# Altium PCB Node.PcbDoc
Units mm, origin at the board's own origin, x right, y up, seen from the top; angles counter-clockwise.
Board outline 80 x 75 mm, 2 copper layers (Top Layer, Bottom Layer); 51 components, 44 nets, 258 pads, 77 vias.
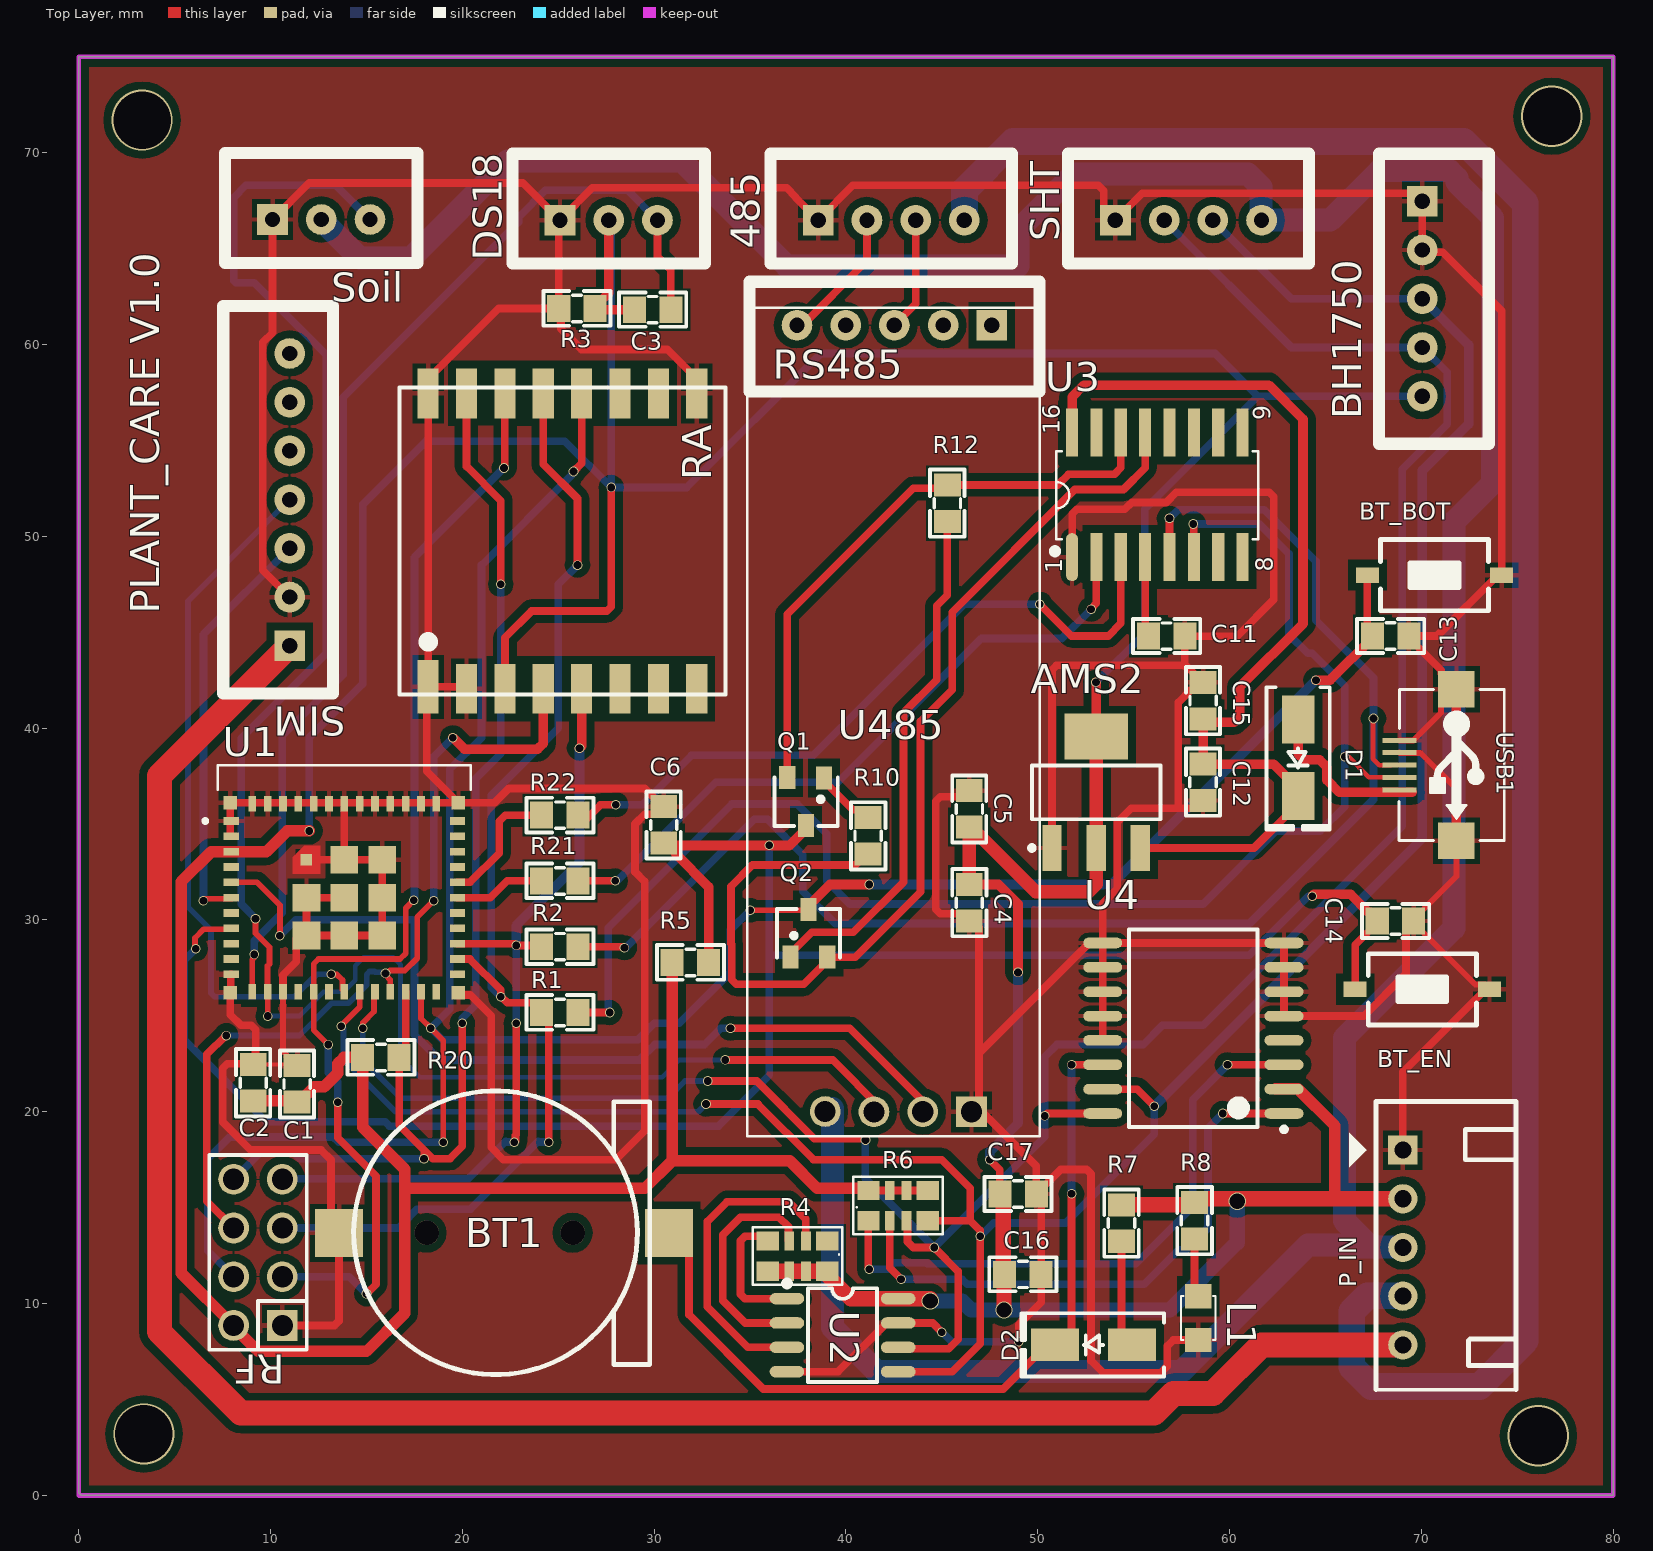
[diagram p0: Top Layer view]
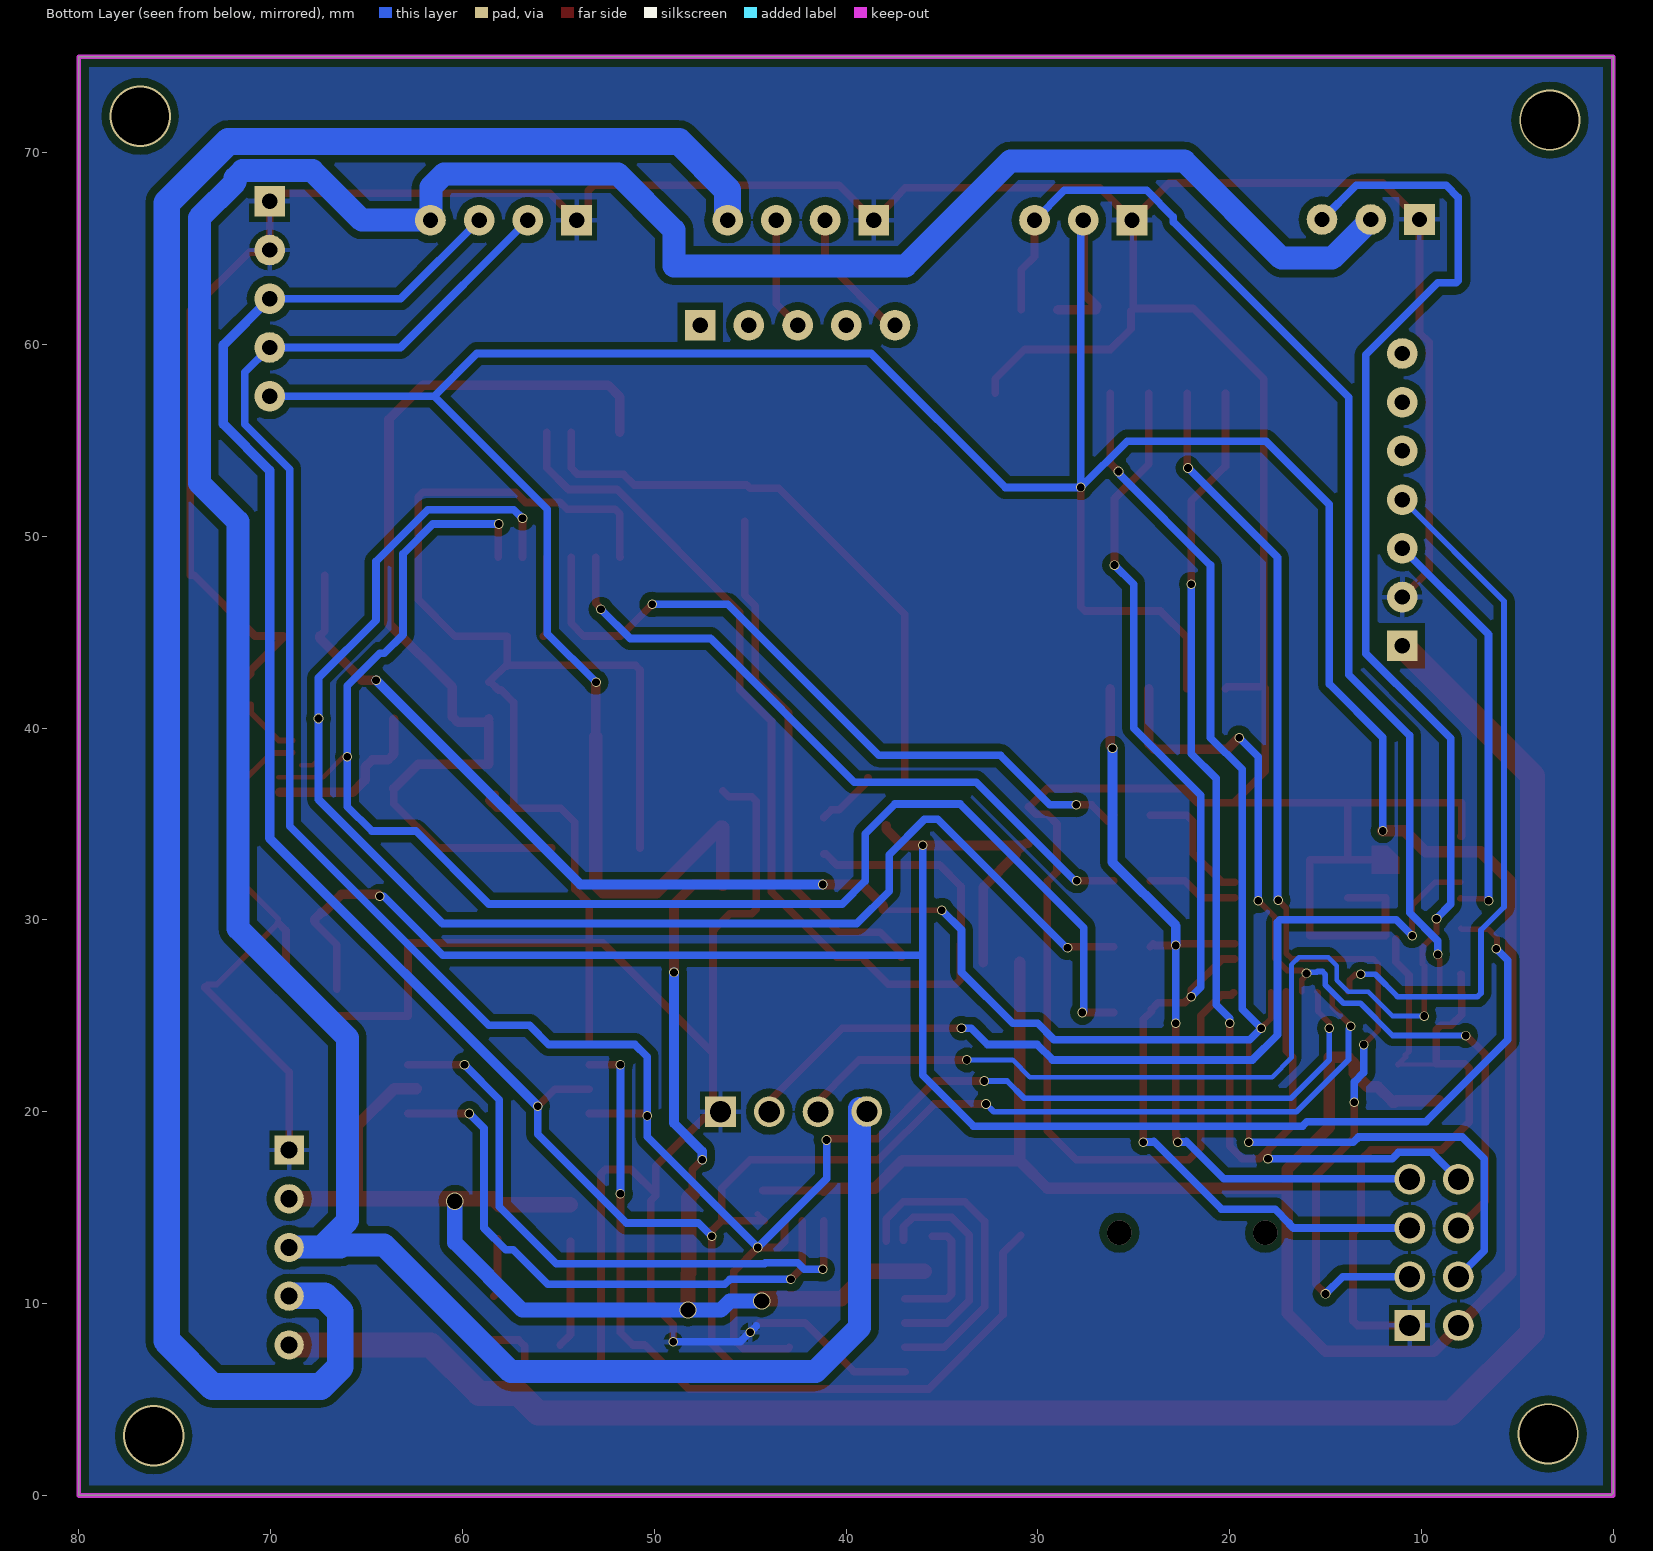
[diagram p1: Bottom Layer view, seen from below]
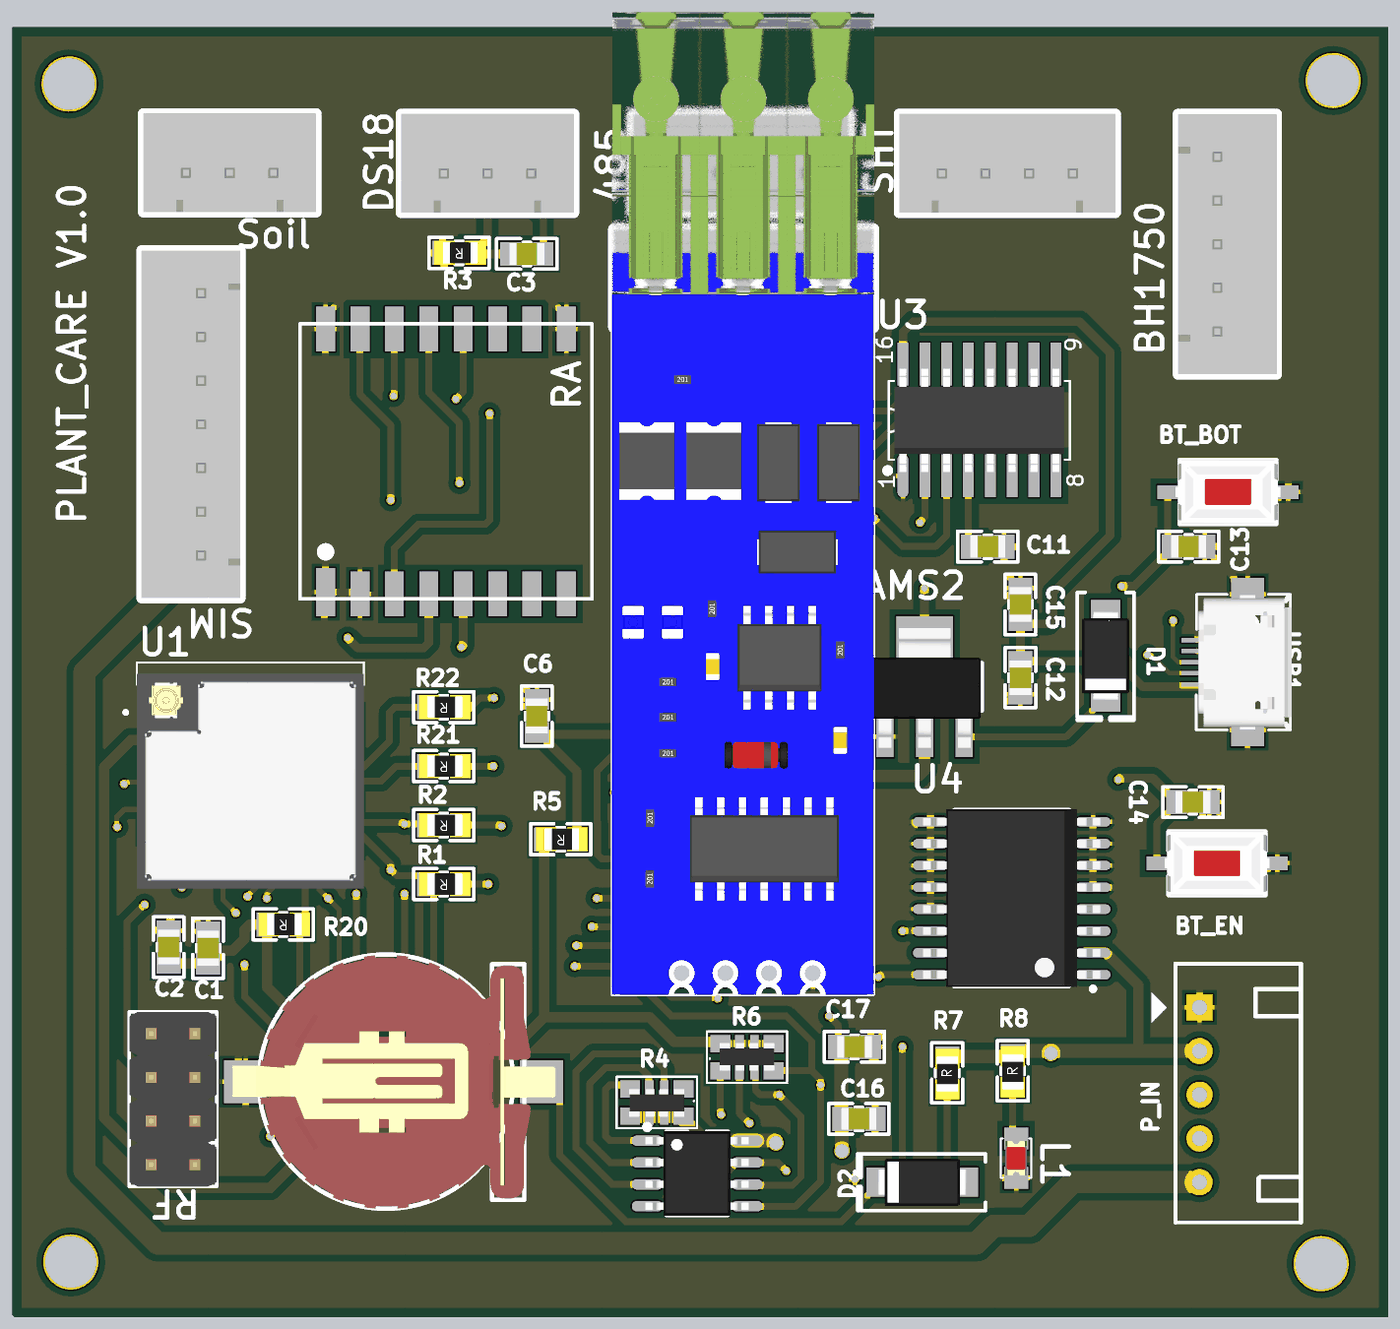
[diagram p2: 3D render of the assembled board from above, using the file's embedded part models]

## Layer stack, top to bottom
Top Solder: solder mask 0.0102, Solder Resist, Dk 3.5
Top Layer: signal copper 0.0356
Dielectric 1: dielectric 0.32, FR-4, Dk 4.8
Bottom Layer: signal copper 0.0356
Bottom Solder: solder mask 0.0102, Solder Resist, Dk 3.5

## Board outline
0.127,0 0,0.127 0,75 80,75 80,0

## Design rules (kind name [scope] priority, off if disabled: settings)
Clearance [All] p1: gap=0.4 ignorepadtopadclearanceinfootprint=FALSE
PolygonConnect [All] p1: connectstyle=Relief reliefconductorwidth=0.254 reliefentries=4 polygonreliefangle="90 Angle" airgapwidth=0.254
RoutingVias [All] p1: holewidth=0.711 width=1.27 viastyle="Through Hole" minholewidth=0.711 minwidth=1.27 maxholewidth=0.711 maxwidth=1.27
SolderMaskExpansion [All] p1: expansion=0.102 istentingtop=FALSE
Width [All] p1: maxlimit=2 minlimit=0.2 preferedwidth=0.2
30 further rules are at their usual default settings.

## Classes and differential pairs
component class Soil: Soil
component class Soil_temp: C3 DS18 R3
component class SIM: SIM
component class SHT: SHT
component class RTC: BT1 C16 C17 D2 L1 R4 R6 R7 R8 U2 U4
component class RS485: 485 RS485 U485
component class RA02: RA RF
component class ESP32C3-MINI: "  " AMS2 BT_BOT BT_EN C1 C2 C4 C5 C6 C11 C12 C13 C14 C15 D1 P_IN Q1 Q2 R1 R2 R5 R10 R12 R20 R21 R22 U1 U3 USB1
component class BH1750: BH1750

## Components (designator, comment, footprint, x,y, rotation, side; value= is the part's Value field where it differs from the comment)
485 "Header 4P 2.54 Duc Thang" XH2.54M-4 38.552,66.484 r0 top
AMS2 "AMS1117-3.3V" SOT223 53.044,36.65 r0 top value="AMS1117-3.3V SOT223"
BH1750 "Header 5P 2.54 Duc Thang" XH2.54M-5 70.048,67.464 r270 top
BT1 "CR1220 SMD" "DE PIN CR1220" 22.169,13.684 r90 top
BT_BOT "Nut Nhan 2 Chan SMD 3x6x2.5" "Nut Nhan 2 Chan SMD 3x6x2.5" 70.683,47.974 r0 top
BT_EN "Nut Nhan 2 Chan SMD 3x6x2.5" "Nut Nhan 2 Chan SMD 3x6x2.5" 70.048,26.384 r0 top
C1 "106" "tu 0805" 11.382,21.447 r90 top
C2 "104" "tu 0805" 9.093,21.509 r90 top
C3 "105" "tu 0805" 29.916,61.817 r0 top
C4 "106" "tu 0805" 46.429,30.899 r270 top
C5 "104" "tu 0805" 46.426,35.782 r90 top
C6 "105" "tu 0805" 30.497,34.946 r90 top
C11 "104" "tu 0805" 56.713,44.799 r0 top
C12 "106" "tu 0805" 58.618,37.179 r270 top
C13 "105" "tu 0805" 68.397,44.799 r180 top
C14 "105" "tu 0805" 68.651,29.94 r180 top
C15 "104" "tu 0805" 58.615,41.432 r90 top
C16 "104" "tu 0805" 49.22,11.525 r0 top
C17 "104" "tu 0805" 48.966,15.716 r0 top
D1 "SS34" "DIODE SMA" 63.571,38.449 r270 top
D2 "SS34" "DIODE SMA" 52.903,7.842 r180 top
DS18 "Header 3P 2.54 Duc Thang" XH2.54M-3 25.09,66.484 r0 top
L1 "LED 0805" LED-0805-Red 58.364,10.382 r270 top
P_IN "Header 5P 2.54 Duc Cong" "Header 5P DC 2.54" 69.032,18.002 r0 top
Q1 "BC817" SOT-23 37.917,36.163 r180 top value=C9014
Q2 "BC817" SOT-23 38.044,29.305 r0 top value=C9014
R1 "0R" "tro smd 0805" 25.09,25.114 r180 top
R2 "0R" "tro smd 0805" 25.09,28.543 r180 top
R3 "4.7k" "tro smd 0805" 25.979,61.817 r180 top
R4 "4.7k" "tro bang 0603 4" 37.5,12.5 r270 top
R5 "10k" "tro smd 0805" 31.891,27.72 r180 top
R6 "4.7k" "tro bang 0603 4" 42.692,15.081 r90 top
R7 "200R" "tro smd 0805" 54.3,14.192 r90 top
R8 "1k" "tro smd 0805" 58.11,14.319 r90 top
R10 "10k" "tro smd 0805" 41.092,34.385 r90 top
R12 "10k" "tro smd 0805" 45.344,51.727 r270 top
R20 "10k" "tro smd 0805" 15.757,22.767 r180 top
R21 "0R" "tro smd 0805" 25.09,31.972 r180 top
R22 "0R" "tro smd 0805" 25.09,35.401 r180 top
RA "RA-02" RA-02 25.217,49.752 r90 top
RF "JP 2x4 2.54" "JP 2x4 DT" 9.342,12.668 r90 top
RS485 "Header 5P 2.54 Duc Thang" XH2.54M-5 47.604,61.009 r180 top
SHT "Header 4P 2.54 Duc Thang" XH2.54M-4 54.046,66.484 r0 top
SIM "Header 7P 2.54 Duc Thang" XH2.54M-7 10.993,44.291 r90 top
Soil "Header 3P 2.54 Duc Thang" XH2.54M-3 10.104,66.516 r0 top
U1 "ESP32-C3-MINI-1U-N4" XCVR_ESP32-C3-MINI-1U-N4 13.845,31.159 r0 top
U2 "M95080" SOP8_L 39.822,8.35 r0 top
U3 "CH340C" SOIC16_50_284_25X90_SMT 56.205,52.165 r90 top
U4 "DS3231 SMD" "SOIC 16" 58.11,24.352 r180 top
U485 "Module rs485" RS485 42.861,50.732 r270 top
USB1 "USB Micro 5p SMD" "USB Micro 5p SMD" 68.858,38.081 r270 top

## Footprints (in the part's own frame and the unit in brackets; to place one, negate y for a bottom-side part, rotate by r counter-clockwise, add the part's x,y. Pads: shape width x height; smd on the part's side, far side on the other; paste and mask are expansions set on the pad)
"DE PIN CR1220" [mm]
  rect 2.5x2.5 smd: 1(0,-8.6) 2(0,8.6)
  silkscreen extent -7.39,-7.6 7.4,7.84, body extent -7.39,-9.42 7.36,9.38, height 4.27
"DIODE SMA" [mm] "SMA"
  rect 2.5x1.7 smd: 1(-2,0) 2(2,0)
  silkscreen extent -3.68,-1.65 3.75,1.65, body extent -2.6,-1.37 2.6,1.37, height 2.4
"Header 5P DC 2.54" [mil]
  rect 60x60 hole 35: 1(0,0)
  round 60 hole 35: 2(0,-100) 3(0,-200) 4(0,-300) 5(0,-400)
  silkscreen extent -110,-492 232,100
"JP 2x4 DT" [mm]
  rect 1.61x1.6 hole 1.1: 1(-3.81,-1.27)
  oval 1.61x1.6 hole 1.1: 2(-1.27,-1.27) 3(1.27,-1.27) 4(3.81,-1.27) 5(3.81,1.27) 6(1.27,1.27) 7(-1.27,1.27) 8(-3.81,1.27)
  silkscreen extent -5.08,-2.54 5.08,2.54, body extent -5.08,-2.54 5.08,2.54, height 8.55
LED-0805-Red [mil]
  rect 50x55 smd: 1(0,0) 2(90,0)
  silkscreen extent 0,-35 90,35, body extent 5,-25 85,25, height 43
"Nut Nhan 2 Chan SMD 3x6x2.5" [mm] "Switch SMD type"
  rect 1.2x0.8 smd: 1(-3.5,0) 2(3.5,0)
  silkscreen extent -2.82,-1.85 2.82,1.85, body extent -3.05,-1.85 3.05,1.85, height 2.5
RA-02 [mm]
  rect 2.8x1.1 smd: 1(-7.6,7)
  rect 2.6x1.1 smd: 2(-7.7,5) 3(-7.7,3) 4(-7.7,1) 5(-7.7,-1) 6(-7.7,-3) 7(-7.7,-5) 8(-7.7,-7) 9(7.7,-7) 10(7.7,-5) 11(7.7,-3) 12(7.7,-1) 13(7.7,1) 14(7.7,3) 15(7.7,5) 16(7.7,7)
  silkscreen extent -8,-8.5 8,8.5
RS485 [mm]
  round 1.6 hole 1.1: 4(30.723,-3.951) 5(30.738,-1.404) 6(30.732,1.139)
  rect 1.6x1.6 hole 1.1: 7(30.736,3.682)
  silkscreen extent -11.18,-8 32,7.24, body extent -25.13,-8 32,7.27, height 19.67
SOIC16_50_284_25X90_SMT [mm]
  oval 2.5x0.635 smd mask+0.076: 1(-3.25,4.42)
  rect 2.5x0.635 smd mask+0.076: 2(-3.25,3.15) 3(-3.25,1.88) 4(-3.25,0.61) 5(-3.25,-0.66) 6(-3.25,-1.93) 7(-3.25,-3.2) 8(-3.25,-4.47) 9(3.25,-4.47) 10(3.25,-3.2) 11(3.25,-1.93) 12(3.25,-0.66) 13(3.25,0.61) 14(3.25,1.88) 15(3.25,3.15) 16(3.25,4.42)
  silkscreen extent -3.07,-5.3 2.26,5.44, body extent -3.02,-4.97 2.98,4.93, height 1.4
"SOIC 16" [mm] "SOIC, 16-Leads, Body 10.30x7.50mm, Pitch 1.27mm, IPC Medium Density"
  oval 2.032x0.55 smd: 1(-4.725,4.445) 2(-4.725,3.175) 3(-4.725,1.905) 4(-4.725,0.635) 5(-4.725,-0.635) 6(-4.725,-1.905) 7(-4.725,-3.175) 8(-4.725,-4.445) 9(4.725,-4.445) 10(4.725,-3.175) 11(4.725,-1.905) 12(4.725,-0.635) 13(4.725,0.635) 14(4.725,1.905) 15(4.725,3.175) 16(4.725,4.445)
  silkscreen extent -4.85,-5.15 3.35,5.39, body extent -5.15,-5.17 5.16,5.16, height 2.48
SOP8_L [mm] "SOIC, 8-Leads, Body 4.9x3.9mm, Pitch 1.27mm, IPC High Density"
  oval 1.8x0.6 smd: 1(-2.9,1.905) 2(-2.9,0.635) 3(-2.9,-0.635) 4(-2.9,-1.905) 5(2.9,-1.905) 6(2.9,-0.635) 7(2.9,0.635) 8(2.9,1.905)
  silkscreen extent -3.2,-2.44 1.8,3, body extent -3.01,-2.45 2.99,2.45, height 1.75
SOT223 [mm]
  rect 1x2.4 smd: 1(-2.3,-2.9) 2(0,-2.9) 3(2.3,-2.9)
  rect 3.3x2.4 smd: 4(0,2.9)
  silkscreen extent -3.47,-3.02 3.35,1.4, body extent -3.25,-3.56 3.25,3.4, height 1.68
SOT-23 [mm] "SOT 23 _ 1-3-2"
  rect 0.85x1.2 smd: 1(-0.94,-1.245) 2(0.985,-1.25) 3(0.005,1.25)
  silkscreen extent -1.65,-1.27 1.65,1.27, body extent -1.47,-1.33 1.53,1.17, height 1.06
"tro bang 0603 4" [mil]
  rect 39.37x45.67 smd: 1(-30,60) 4(-30,-62) 5(32,-62) 8(32,60)
  rect 39.37x20 smd: 2(-30.06,16.08) 3(-30,-18.08) 6(32.06,-18.08) 7(32.06,16.08)
  silkscreen extent -58,-93 60,91, body extent -29,-64 33,62, height 22
"tro smd 0805" [mm]
  rect 1.2x1.4 smd: 1(-0.946,-0.061) 2(0.954,-0.061)
  silkscreen extent -1.75,-0.97 1.75,0.84, body extent -1.56,-0.76 1.44,0.64, height 0.53
"tu 0805" [mm] "Compoment SMD 80x50mil"
  rect 1.2x1.4 smd: 1(-0.946,-0.003) 2(0.954,-0.003)
  silkscreen extent -1.75,-0.89 1.75,0.89, body extent -1.01,-0.64 1.01,0.63, height 0.61
"USB Micro 5p SMD" [mil]
  rect 10x70 smd: 1(51.18,0) 2(25.59,0) 3(0,0) 4(-25.59,0) 5(-50,0)
  rect 74.8x74.8 smd: 5(-155.51,116.84) 5(155.51,116.84)
  silkscreen extent -155,-1 155,215, body extent -157,5 158,218, height 107
XCVR_ESP32-C3-MINI-1U-N4 [mm]
  rect 0.8x0.4 smd: 1(-5.9,4) 2(-5.9,3.2) 3(-5.9,2.4) 4(-5.9,1.6) 5(-5.9,0.8) 6(-5.9,0) 7(-5.9,-0.8) 8(-5.9,-1.6) 9(-5.9,-2.4) 10(-5.9,-3.2) 11(-5.9,-4) 25(5.9,-4) 26(5.9,-3.2) 27(5.9,-2.4) 28(5.9,-1.6) 29(5.9,-0.8) 30(5.9,0) 31(5.9,0.8) 32(5.9,1.6) 33(5.9,2.4) 34(5.9,3.2) 35(5.9,4)
  rect 0.4x0.8 smd: 12(-4.8,-4.9) 13(-4,-4.9) 14(-3.2,-4.9) 15(-2.4,-4.9) 16(-1.6,-4.9) 17(-0.8,-4.9) 18(0,-4.9) 19(0.8,-4.9) 20(1.6,-4.9) 21(2.4,-4.9) 22(3.2,-4.9) 23(4,-4.9) 24(4.8,-4.9) 36(4.8,4.9) 37(4,4.9) 38(3.2,4.9) 39(2.4,4.9) 40(1.6,4.9) 41(0.8,4.9) 42(0,4.9) 43(-0.8,4.9) 44(-1.6,4.9) 45(-2.4,4.9) 46(-3.2,4.9) 47(-4,4.9) 48(-4.8,4.9)
  rect 0.6x0.6 smd paste-1 mask+0: 49_1(-1.975,1.975)
  rect 1.45x1.45 smd: 49_2(0,1.975) 49_3(1.975,1.975) 49_4(1.975,0) 49_5(1.975,-1.975) 49_6(0,-1.975) 49_7(-1.975,-1.975) 49_8(-1.975,0) 49_9(0,0)
  rect 0.7x0.7 smd: 50(5.95,4.95) 51(5.95,-4.95) 52(-5.95,-4.95) 53(-5.95,4.95)
  Top Layer region: -1.25,1.25 -2.7,1.25 -2.7,2.1 -2.1,2.7 -1.25,2.7
  silkscreen extent -7.35,3.9 6.6,6.9, body extent -6.6,-6.25 6.6,6.25, height 2.55
XH2.54M-3 [mm]
  rect 1.6x1.6 hole 0.8: 1(0,0)
  round 1.6 hole 0.8: 2(2.54,0) 3(5.08,0)
  silkscreen extent -2.48,-2.26 7.56,3.46, body extent -2.48,-2.26 7.56,3.48, height 6.91
XH2.54M-4 [mm]
  rect 1.6x1.6 hole 0.8: 1(0,0)
  round 1.6 hole 0.8: 2(2.54,0) 3(5.08,0) 4(7.62,0)
  silkscreen extent -2.48,-2.26 10.1,3.46, body extent -2.48,-2.26 10.1,3.48, height 6.91
XH2.54M-5 [mm]
  rect 1.6x1.6 hole 0.8: 1(0,0)
  round 1.6 hole 0.8: 2(2.54,0) 3(5.08,0) 4(7.62,0) 5(10.16,0)
  silkscreen extent -2.48,-2.26 12.64,3.46, body extent -2.48,-2.26 12.64,3.48, height 6.91
XH2.54M-7 [mm]
  rect 1.6x1.6 hole 0.8: 1(0,0)
  round 1.6 hole 0.8: 2(2.54,0) 3(5.08,0) 4(7.62,0) 5(10.16,0) 6(12.7,0) 7(15.24,0)
  silkscreen extent -2.48,-2.26 17.72,3.46, body extent -2.48,-2.26 17.72,3.48, height 6.91

## Part data
485 BH1750 DS18 P_IN RS485 SHT SIM Soil: "Cắm", Chung_Loai=Cắm, Don_Vi=Con
  485 SHT: Ma_Hang=MH001285, Ten_Linh_Kien="Header 4P XH2.54-4P Đực Thẳng"
  BH1750 RS485: Ma_Hang=MH001298, Ten_Linh_Kien="Header 5P XH2.54-5P Đực Thẳng"
  DS18 Soil: Ma_Hang=MH001292, Ten_Linh_Kien="Header 3P XH2.54-3P Đực Thẳng"
  P_IN: Ma_Hang=MH001308, Ten_Linh_Kien="Header 5P XH2.54-5P Đực Cong"
  SIM: Ma_Hang=MH003369, Ten_Linh_Kien="Header 7P XH2.54-7P Đực Thẳng"
AMS2: library part "AMS1117 SMD", "Dán", Chung_Loai=Dán, Don_Vi=Con, Ma_Hang=MH000596
BT1: library part "De pin CR1220 SMD", Ma_Hang=MH000833, Ten="Đế PIN CR1220 SMD"
C1 C4 C12: library part "Tu 0805 106 16V 10%", "Dán", Chung_Loai=Dán, Don_Vi=Con, Ma_Hang=MH004553, So_Chan=2, Ten_Linh_Kien="Tụ 0805 106-10uF 10% 16V"
C2 C5 C11 C15 C16 C17: library part "Tu 0805 104 50V 10%", "Dán", Chung_Loai=Dán, Don_Vi=Con, Ma_Hang=MH004551, So_Chan=2, Ten_Linh_Kien="Tụ 0805 104-100nF 10% 50V"
C3 C6 C13 C14: library part "Tu 0805 105 50V 10%", "Dán", Chung_Loai=Dán, Don_Vi=Con, Ma_Hang=MH004552, So_Chan=2, Ten_Linh_Kien="Tụ 0805 105-1uF 10% 50V"
D1 D2: library part "Diode SS34 ( 1N5822 )", "Dán", Chung_Loai=Dán, Don_Vi=Con, Ma_Hang=MH002104, Ten_Linh_Kien="Diode SS34 3A 40V SMA ( 1N5822 SS34A)"
L1: library part "LED 0805 Do", "Dán", Chung_Loai=Dán, Don_Vi=Con, Ma_Hang=MH000897, Ten_Linh_Kien="LED 0805 Màu Đỏ (Red)"
Q1 Q2: library part "Trans BC817", "SOT-23 - C8658"
R1 R2 R21 R22: library part "Tro 0805 5% 0R", "Dán", Chung_Loai=Dán, Don_Vi=Con, Ma_Hang=MH005230, So_Chan=2, Ten_Linh_Kien="Trở 0805 5% 0R"
R3: library part "Tro 0805 5% 4.7k", "Dán", Chung_Loai=Dán, Don_Vi=Con, Ma_Hang=MH005307, So_Chan=2, Ten_Linh_Kien="Trở 0805 5% 4.7k"
R4 R6: library part "Tro bang 0603 4.7k", "Dán", Chung_Loai=Dán, Don_Vi=Con, Ma_Hang=MH001448, So_Chan=8, Ten_Linh_Kien="Trở băng 0603x4 4.7k"
R5 R10 R12 R20: library part "Tro 0805 1% 10k", "Dán", Chung_Loai=Dán, Don_Vi=Con, Ma_Hang=MH005473, So_Chan=2, Ten_Linh_Kien="Trở 0805 1% 10k"
R7: library part "Tro 0805 5% 220R", "Dán", Chung_Loai=Dán, Don_Vi=Con, Ma_Hang=MH005259, So_Chan=2, Ten_Linh_Kien="Trở 0805 5% 220R"
R8: library part "Tro 0805 1% 1k", "Dán", Chung_Loai=Dán, Don_Vi=Con, Ma_Hang=MH005468, So_Chan=2, Ten_Linh_Kien="Trở 0805 1% 1k"
RA: "General ISM < 1GHz LoRaâ„¢ Transceiver Module 410MHz ~ 525MHz Antenna Not Included, I-PEX Surface Mount", Package=None, Availability="Not in stock", Check_prices=https://www.snapeda.com/parts/RA-02/AI-Thinker/view-part/?ref=eda, MF=Ai-Thinker, MP=RA-02, Price=None, SnapEDA_Link=https://www.snapeda.com/parts/RA-02/AI-Thinker/view-part/?ref=snap
RF: library part "JP 2x4 2.54 Duc Thang", "Cắm", Chung_Loai=Cắm, Don_Vi=Con, Ma_Hang=MH002686, Ten_Linh_Kien="Jump Đôi Đực 2.54MM 2x40P Thẳng 11MM"
U1: "Bluetooth, WiFi 802.11b/g/n, Bluetooth v5.0 Transceiver Module 2.412GHz ~ 2.484GHz Antenna Not Included, I-PEX Surface Mount", Package=None, Availability="In Stock", Check_prices=https://www.snapeda.com/parts/ESP32-C3-MINI-1U-N4/Espressif+Systems/view-part/?ref=eda, MF="Espressif Systems", MP=ESP32-C3-MINI-1U-N4, Price=None, Purchase-URL=https://pricing.snapeda.com/search/part/ESP32-C3-MINI-1U-N4/?ref=eda, SnapEDA_Link=https://www.snapeda.com/parts/ESP32-C3-MINI-1U-N4/Espressif+Systems/view-part/?ref=snap
U2: library part EEPROM_M95080, "EEPROM_M95080"
U3: library part IC_CH340C, "USB Bridge, USB to UART USB 2.0 UART Interface", Alternate Part Number-1=NA, Case/Package=SOIC16, Manufacturer=Olimex, Supplier Part Number-1=C84681, Manufacturer Part Number=CH340C, Supplier-1=LCSC
U4: "SOIC"
USB1: "USB Type B", Ma_Hang=MH001020, Ten="MicroUSB MK5P SMD"
BT_BOT BT_EN: Ma_Hang=MH001036, Ten="Nút Nhấn 2 Chân 3x6x2.5MM SMD"

## Via types
v1: diameter 0.5, hole 0.4, Top Layer to Bottom Layer, 68 vias
v2: diameter 3.2, hole 3, Top Layer to Bottom Layer, 4 vias
v3: diameter 0.9, hole 0.8, Top Layer to Bottom Layer, 3 vias
v4: diameter 1.27, hole 1.27, Top Layer to Bottom Layer, 2 vias

## Nets (pads, with @x,y where several pads share a name; then routed paths per layer and width w, separated by ;. In a path a pad name is that pad's centre, name@x,y a point inside that pad or via, vN(x,y) a via of type N, cw(c..) or ccw(c..) an arc to the next point about the centre after c; other vN are vias at no path point)
BAT_11V6: 485.4 P_IN.4 | length 108.8
  Bottom Layer w1.4: 485.4 46.172,68.04 48.712,70.58 72.207,70.58 75.411,67.376 75.411,8.056 73.038,5.683 67.381,5.683 66.365,6.699 66.365,9.586 67.185,10.406 69.008,10.406 P_IN.4
CHIP_EN: BT_EN.1 C6.1 C14.2 Q1.3 R5.1 U1.8 | length 105.4
  Top Layer w0.3: v1(6.1,28.5) 6.062,28.538 6.062,29.062 6.509,29.509 7.895,29.509 U1.8
  Top Layer w0.4: BT_EN.1 66.548,28.695 67.697,29.843 C14.2
  Top Layer w0.5: C6.1 C6.1@30.6,34 ; R5.1 32.837,31.718 31.128,33.427 31.128,33.527 30.778,33.877 35.977,33.877 v1(36,33.9) ; v1@36.139,33.877 37.051,33.877 37.912,34.738 Q1.3 ; v1(64.302,31.241) 64.398,31.337 66.303,31.337 67.247,30.393 67.347,30.393 67.697,30.043 C14.2
  Bottom Layer w0.4: v1(6.1,28.5) v1(6.1,28.5) 5.5,27.898 5.5,23.749 9.766,19.483 15.97,19.483 16.203,19.25 33.35,19.25 36,21.9 36,28.162 ; v1(36,33.9) 36,28.162 ; v1(64.302,31.241) 64.11,31.241 61.031,28.162 36,28.162
DN: R1.1 U3.6 USB1.2 | length 78.8
  Top Layer w0.25: v1(66,38.5) 66.2,38.5 67.263,37.437 USB1.2@69.6,37.437
  Top Layer w0.4: R1.1 v1(27.675,25.175) ; v1(58.11,50.641) 58.135,50.616 U3.6
  Bottom Layer w0.4: v1(27.675,25.175) 27.598,25.252 27.598,29.598 34.04,36.04 37.46,36.04 39,34.5 39,32.032 40.203,30.829 58.618,30.829 62.428,34.639 64.73,34.639 66,35.909 v1(66,38.5) 66,42.202 64.304,43.898 64.075,43.898 63.092,44.881 63.092,49.088 61.539,50.641 v1(58.11,50.641)
DP: R2.1 U3.5 USB1.3 | length 78.1
  Top Layer w0.2: v1@67.469,40.469 v1(67.5,40.5)
  Top Layer w0.25: v1@67.469,40.469 67.469,38.397 67.798,38.068 USB1.3@68.397,38.068
  Top Layer w0.4: R2.1 28.396,28.604 v1(28.448,28.552) ; v1@56.84,50.96 v1(56.865,50.935) U3.5
  Bottom Layer w0.4: v1(28.448,28.552) 28.528,28.552 35.216,35.24 35.907,35.24 37.752,33.395 37.752,31.502 39.441,29.813 61.035,29.813 67.5,36.278 v1(67.5,40.5) 67.5,42.617 64.5,45.617 64.5,48.696 61.805,51.391 57.32,51.391 v1(56.865,50.935)
DTR: Q2.2 R10.1 U3.13 | length 55.1
  Top Layer w0.4: R10.1 41.053,33.439 40.474,32.861 35.123,32.861 34,31.738 34,28.767 34.037,28.73 34.037,26.872 34.271,26.638 37.788,26.638 39.029,27.88 Q2.2 40.477,28.055 43.886,31.464 43.886,40.354 45.537,42.005 45.537,46.042 51.934,52.439 54.469,52.439 55.595,53.565 U3.13
GND: 485.1 AMS2.1 BH1750.1 BH1750.2 BT1.2 BT_BOT.2 BT_EN.2 C1.2 C2.2 C4.2 C5.2 C6.2 C11.2 C12.2 C13.1 C14.1 C15.2 C16.2 C17.2 DS18.1 L1.2 P_IN.1 R3.2 RA.1 RA.2 RA.9 RA.16 RF.1 SHT.1 SIM.2 Soil.1 U1.1 U1.2 U1.11 U1.14 U1.36 U1.37 U1.38 U1.39 U1.40 U1.41 U1.42 U1.43 U1.44 U1.45 U1.46 U1.47 U1.48 U1.49_1 U1.49_2 U1.49_3 U1.49_4 U1.49_5 U1.49_6 U1.49_7 U1.49_8 U1.49_9 U1.50 U1.51 U1.52 U1.53 U2.4 U2.7 U3.1 U4.5 U4.6 U4.7 U4.8 U4.9 U4.10 U4.11 U4.12 U4.13 U485.7 USB1.4 USB1.5 | length 486.4
  Top Layer w0.2: C2.2 C1.2@11.224,22.463
  Top Layer w0.3: U1.14 10.645,25.323 10.65,25.318 10.65,24.656 10.645,24.651 10.645,23.142 10.835,22.951 10.835,22.851 C1.2@11.224,22.463 ; USB1.4 68.881,38.708 69.954,38.708 71.826,36.836 ; USB1.5@68.858,39.351 69.574,39.351 71.026,40.803 71.026,41.231 71.038,41.243 USB1.5@71.826,41.243 ; USB1.5@71.826,34.131 71.826,32.273 69.597,30.043 C14.1 69.597,29.843 72.806,26.634 73.298,26.634 BT_EN.2@73.423,26.509
  Top Layer w0.4: U1.11 7.92,27.159 7.92,26.234 U1.52 7.895,25.064 8.459,24.5 9,24.5 9.234,24.266 9.234,22.512 9.246,22.5 7.734,22.5 7.5,22.266 7.5,19.463 8.961,18.002 12.644,18.002 13.152,17.494 13.152,14.101 BT1.2 13.569,9.092 13.335,8.858 RF.1 ; U1.2 7.895,34.359 U1.53 11.445,36.109 13.045,36.109 16.245,36.109 18.645,36.109 U1.50 ; U1.14 10.645,27.12 11.335,27.81 U1.49_7@11.335,29 ; SIM.2 9.593,48.231 9.593,60.111 10.104,60.622 Soil.1 12.009,68.421 23.153,68.421 DS18.1 ; U1.49_1 U1.49_2 ; U1.49_9 U1.49_8 U1.49_7 U1.49_6 U1.49_5 U1.49_4 U1.49_3 U1.49_2 ; U1.42 U1.49_2 ; U1.51 19.915,26.089 20.411,26.089 21.5,25 21.5,18.14 22.14,17.5 28,17.5 29.5,19 29.5,32 29,32.5 29,35 29.5,35.5 30.1,35.5 C6.2@30.478,35.877 ; RA.2 20.117,42.152 RA.1 ; C6.2 C6.2@30.478,35.877 ; RA.9 32.217,58.202 30.678,59.741 26.211,59.741 25.139,60.812 25.139,61.763 R3.2 ; U2.4 39.579,6.445 42.119,8.985 U2.7 44.515,8.985 v1(45,8.5) ; C5.2 46.11,36.417 44.92,36.417 44.686,36.183 44.686,30.555 44.92,30.321 46.05,30.321 C4.2 C4.2@46.843,29.528 ; U485.7@46.933,20.415 46.933,20.159 49.92,17.171 C17.2 ; 46.933,23.046 C4.2@46.933,29.619 ; U485.7@46.934,20.415 46.934,23.046 52.685,28.797 U4.9 ; v1(49,8) 49,8.892 50.174,10.066 C16.2 50.174,15.359 49.92,15.613 C17.2 ; AMS2.1 50.744,43.041 50.978,43.275 57.652,43.275 ; U3.1 51.795,48.925 51.795,51.169 52.029,51.403 54.539,51.403 54.896,51.76 56.689,51.76 57.22,52.292 62.067,52.292 62.301,52.058 62.301,46.704 60.393,44.796 C11.2 57.667,43.337 ; U4.13 U4.12 U4.11 U4.10 U4.9 ; 57.315,35.9 57.315,41.331 57.969,41.986 58.118,41.986 C15.2@58.518,42.386 ; 57.667,43.237 57.667,43.337 ; C12.2@58.289,36.55 C12.2 58.215,35.825 54.87,35.825 54.144,35.099 54.144,31.615 53.385,30.856 U4.9 ; L1.2 57.066,8.096 56.753,7.783 56.753,6.743 56.402,6.392 53.404,6.392 52.776,7.02 52.776,16.752 52.542,16.986 51.194,16.986 C17.2 ; C15.2 57.667,43.337 ; P_IN.1 69.032,22.068 73.423,26.459 BT_EN.2@73.423,26.509 ; C14.1@69.597,29.843 69.197,29.443 69.197,27.184 67,24.987 U4.5 U4.6 U4.7 U4.8 U4.9 ; USB1.5@71.826,42.031 71.026,42.831 71.026,43.019 69.343,44.702 C13.1 70.811,44.802 73.983,47.974 BT_BOT.2 74.183,61.746 71.117,64.812 70.159,64.812 BH1750.2 BH1750.1 69.628,67.884 55.446,67.884 SHT.1 53.446,67.084 53.446,68.005 53.157,68.294 40.362,68.294 485.1 37.386,67.649 37.386,67.682 36.901,68.167 26.773,68.167 DS18.1 ; RA.1 18.15,42.085 18.15,37.754 U1.50 ; RA.1 RA.16 18.217,58.202 21.893,61.878 R3.2 ; U1.50 21.675,36.109 22.416,36.85 29.505,36.85 C6.2@30.478,35.877 ; R3.2 25.025,66.418 DS18.1
  Top Layer w0.5: USB1.5@71.826,34.131 71.826,36.836 USB1.5@71.826,41.243
  Bottom Layer w0.4: 44.681,8.825 45.506,8 v1(49,8)
GPIO0: C3.2 DS18.3 U1.12 | length 59.6
  Top Layer w0.3: U1.12 9.045,27.935 9.107,27.997 9.107,28.162 v1(9.145,28.2)
  Top Layer w0.4: DS18.3 30.17,64.587 30.87,63.886 C3.2
  Bottom Layer w0.4: v1(9.145,28.2) 9.145,28.899 10.612,30.366 10.612,39.612 13.787,42.787 13.787,57.245 22.931,66.389 22.931,66.643 24.328,68.04 28.614,68.04 DS18.3
GPIO1: Soil.3 U1.13 U485.5 | length 96.4
  Top Layer w0.2: U1.13 U1.13@9.848,26.257 ; v1@9.848,24.99 v1(9.85,24.987)
  Top Layer w0.3: v1(9.215,30.067) 9.215,29.305 9.945,28.575 9.945,27.704 9.845,27.604 U1.13 ; v1@9.848,24.99 U1.13@9.848,26.257
  Top Layer w0.4: v1(33.7,22.7) 39.304,22.7 U485.5@41.847,20.157
  Bottom Layer w0.25: v1(9.85,24.987) 11.501,24.987 12.764,26.25 13.811,26.25 14.412,26.851 14.412,27.613 14.852,28.054 16.383,28.054 16.775,27.662 16.775,22.814 17.789,21.8 30.412,21.8 31.312,22.7 v1(33.7,22.7)
  Bottom Layer w0.4: v1@9.21,30.096 8.477,30.829 8.477,39.477 10.711,41.711 10.72,41.711 11.819,42.81 12.898,43.889 12.898,59.464 9.148,63.214 8.189,63.214 8.072,63.331 8.072,67.659 8.707,68.294 13.406,68.294 Soil.3
GPIO2: U1.5 U485.6 | length 47.8
  Top Layer w0.3: U1.5 9.293,31.959 10.485,30.767 v1(10.485,29.178)
  Top Layer w0.4: v1(33.98,24.352) 40.201,24.352 U485.6@44.39,20.163
  Bottom Layer w0.4: v1(10.485,29.178) 11.307,30 17.383,30 17.5,29.883 17.5,24.009 18.809,22.7 29.231,22.7 30.031,23.5 32.62,23.5 33.472,24.352 v1(33.98,24.352)
GPIO3: SIM.3 U1.6 | length 21.8
  Top Layer w0.3: v1(6.5,31) 6.609,31.109 7.995,31.109 U1.6
  Bottom Layer w0.4: v1(6.5,31) 6.5,44.878 SIM.3
GPIO4: SIM.4 U1.18 | length 36.6
  Top Layer w0.3: v1(13.162,27.162) 13.164,27.159 13.452,27.159 13.745,26.866 13.745,26.359 U1.18
  Bottom Layer w0.3: SIM.4 5.7,46.618 5.7,30.669 6.9,29.469 6.9,26.176 7.076,26 11.244,26 12.406,27.162 v1(13.162,27.162)
GPIO5: BH1750.3 R6.4 SHT.3 U1.19 U2.5 U4.15 | length 133.9
  Top Layer w0.3: v1(13.681,24.455) 13.681,24.5 14.645,25.464 U1.19 ; R6.4 R6.4@44.617,14.669
  Top Layer w0.4: v1(32.7,20.4) 35.409,20.4 38.309,17.5 45,17.5 46.484,16.016 46.484,14.319 ; U2.5@42.87,6.445 45.545,6.445 47,7.9 v1(47,13.5) 47,13.803 46.484,14.319 ; R6.4 46.484,14.319 ; U4.15 55.189,21.177 v1(56.078,20.288)
  Bottom Layer w0.3: v1(13.681,24.455) 13.8,24.336 13.8,22.714 16.514,20 32.3,20 v1(32.7,20.4)
  Bottom Layer w0.4: v1(47,13.5) 47.702,14.202 51.448,14.202 56.078,18.832 v1(56.078,20.288) ; SHT.3 63.226,62.384 BH1750.3
  Bottom Layer w0.5: v1(56.078,20.288) 70.048,34.258 70.048,53.435 72.461,55.848 72.461,59.971 BH1750.3
GPIO6: BH1750.4 R6.3 SHT.2 U1.20 U2.6 U4.16 | length 132.4
  Top Layer w0.3: v1(14.803,24.352) 14.803,24.632 15.395,25.224 15.395,26.209 U1.20
  Top Layer w0.4: v1(32.8,21.6) 35.34,21.6 38.346,18.594 40.944,18.594 v1(41.015,18.524) ; U2.6@42.96,7.715 43.025,7.65 45.352,7.65 45.85,8.148 45.85,11.666 v1(44.594,12.922) 43.505,12.922 43.206,13.221 43.206,14.265 R6.3 ; v1(50.363,19.78) 50.49,19.907 U4.16
  Bottom Layer w0.3: v1(14.803,24.352) 14.803,22.701 16.804,20.7 30.709,20.7 31.609,21.6 v1(32.8,21.6)
  Bottom Layer w0.4: v1(41.015,18.524) 41.015,18.515 41,18.5 41,16.516 v1(44.594,12.922) 50.363,18.691 v1(50.363,19.78) 50.363,22.863 51,23.5 55.5,23.5 56.5,24.5 58.621,24.5 69,34.879 69,53.5 71.348,55.848 71.348,58.544 BH1750.4 63.226,59.844 SHT.2
GPIO7: RA.4 RF.6 U1.21 | length 44.3
  Top Layer w0.3: U1.21 16.245,26.874 15.991,27.128 v1(15.991,27.209) 16.073,27.209 16.223,27.359 17.001,27.359 17.645,28.003 17.645,30.145 v1(18.5,31)
  Top Layer w0.4: v1(7.691,23.971) 7.652,23.971 6.675,22.994 6.675,15.335 RF.6
  Top Layer w0.5: v1(19.5,39.5) 20.1,38.9 23.924,38.9 24.217,39.193 RA.4
  Bottom Layer w0.3: v1(7.691,23.971) 11.501,23.971 13.18,25.65 14.059,25.65 15.012,26.602 15.012,27.153 15.163,27.304 15.415,27.304 15.453,27.266 15.934,27.266 v1(15.991,27.209)
  Bottom Layer w0.4: v1(18.5,31) 18.5,38.5 v1(19.5,39.5)
GPIO8: R20.1 RA.15 RF.5 U1.22 | length 63.3
  Top Layer w0.4: U1.22 17.045,23.17 R20.1 16.703,19.297 18.019,17.981 ; v1(18,17.55) 18,17.65 18.019,17.669 18.019,17.981 ; v1(20,24.605) 20,18.198 19.352,17.55 18.45,17.55 18.019,17.981 ; RA.15 20.217,53.642 22,51.859 v1(22,47.5)
  Bottom Layer w0.4: RF.5 9.477,17.883 11.192,17.883 11.525,17.55 v1(18,17.55) ; v1(20,24.605) 20,24.869 20.7,25.569 20.7,37.373 22,38.673 v1(22,47.5)
GPIO9: BT_BOT.1 C13.2 Q2.3 RA.12 RF.7 U1.23 | length 127
  Top Layer w0.3: U1.23 17.845,24.866 v1(18.359,24.352) 19,23.711 v1(19,18.4) ; v1(35,30.5) 37.994,30.5 Q2.3
  Top Layer w0.4: v1(25.794,53.377) 26.217,53.8 RA.12 ; BT_BOT.1 67.183,45.062 C13.2
  Top Layer w0.5: Q2.3 38.049,30.73 39.164,31.845 v1(41.219,31.845) ; v1(64.5,42.5) 65.24,42.5 67.443,44.702 C13.2
  Bottom Layer w0.4: RF.7 8.072,11.403 6.722,12.753 6.722,17.541 7.864,18.683 13.277,18.683 13.56,18.4 v1(19,18.4) ; v1(25.794,53.377) 25.794,53.323 25.694,53.223 25.694,53.194 21,48.5 21,39.5 19.35,37.85 19.35,25.35 18.359,24.359 v1(18.359,24.352) 18.956,23.755 29.155,23.755 30.007,24.607 31.314,24.607 33.98,27.273 33.98,29.48 v1(35,30.5)
  Bottom Layer w0.5: v1(41.219,31.845) 53.845,31.845 v1(64.5,42.5)
GPIO10: RA.14 RF.2 U1.16 | length 59.9
  Top Layer w0.3: v1(13,23.5) 12.245,24.255 U1.16 12.245,27.704 12.5,27.959 16.752,27.959 17.045,28.252 17.045,30.606 v1(17.47,31.03)
  Top Layer w0.4: v1(13.5,20.5) 13.5,18.637 15.5,16.637 15.5,11 v1(15,10.5) ; v1(22.169,53.562) 22.217,53.61 RA.14
  Bottom Layer w0.4: RF.2 14.102,11.398 v1(15,10.5) ; v1(13,23.5) 13,22.046 13.5,21.546 v1(13.5,20.5) ; v1(17.47,31.03) 17.5,31.061 17.5,48.893 v1(22.169,53.562)
GPIO18: R1.2 RA.13 RF.3 U1.26 | length 62.8
  Top Layer w0.4: U1.26 20.394,27.959 22,26.353 v1(22,26) 22.027,26 22.352,25.675 23.736,25.675 24.069,25.341 24.069,25.241 24.5,24.81 v1(24.5,18.4) ; RA.13 24.217,53.753 26,51.97 v1(26,48.5)
  Bottom Layer w0.4: RF.3 16.674,13.938 16.908,14.172 16.908,14.196 17.632,14.919 20.419,14.919 23.95,18.45 23.981,18.419 24.481,18.419 v1(24.5,18.4) ; v1(22,26) 21.5,26.5 21.5,36.5 25,40 25,47.5 v1(26,48.5)
GPIO19: R2.2 RA.5 RF.4 U1.27 | length 42.6
  Top Layer w0.4: U1.27 22.715,28.759 v1(22.804,28.67) 23.891,28.67 23.98,28.759 R2.2 ; v1(22.698,18.4) 22.767,18.469 22.767,18.763 22.804,18.8 v1(22.804,24.605)
  Top Layer w0.5: v1(26.106,38.957) 26.217,39.068 RA.5
  Bottom Layer w0.4: RF.4 10.634,16.5 20.313,16.5 22.263,18.45 22.294,18.419 22.679,18.419 v1(22.698,18.4) ; v1(22.804,24.605) v1(22.804,28.67)
  Bottom Layer w0.5: v1(22.804,28.67) 22.804,29.7 26.106,33.002 v1(26.106,38.957)
Net485_2: 485.2 RS485.5 | length 7.1
  Top Layer w0.4: RS485.5@37.594,60.859 41.092,64.357 485.2
Net485_3: 485.3 RS485.3 | length 5.9
  Top Layer w0.4: RS485.3 43.632,62.117 485.3
NetBT1_1: BT1.1 D2.2 U4.14 | length 42.9
  Top Layer w0.4: BT1.1@30.896,13.557 31.819,12.634 31.819,9.415 35.689,5.545 48.206,5.545 50.503,7.842 51.11,7.842 51.76,8.492 v1(51.76,15.716) ; v1(51.76,22.447) U4.14
  Bottom Layer w0.4: v1(51.76,15.716) v1(51.76,22.447)
NetBT_1-: 
NetBT_2+: 
NetC11_1: C11.1 U3.4 | length 4.2
  Top Layer w0.4: U3.4 55.595,44.968 C11.1
NetD1_1: D1.1 USB1.1 | length 9
  Top Layer w0.5: D1.1 63.571,38.642 63.864,38.349 64.69,38.349 65.071,37.968 65.071,37.293 65.71,36.654 USB1.1@69.523,36.654
NetD2_1: D2.1 R7.1 | length 5.6
  Top Layer w0.4: R7.1 54.361,8.384 D2.1
NetL1_1: L1.1 R8.1 | length 3.1
  Top Layer w0.4: R8.1 58.171,10.575 L1.1
NetQ1_1: Q1.1 R10.2 | length 3.3
  Top Layer w0.4: Q1.1 38.857,37.233 40.35,35.739 40.753,35.739 R10.2
NetQ2_1: Q2.1 R12.2 | length 27.4
  Top Layer w0.4: Q2.1 37.104,28.235 38.224,29.355 40.38,29.355 42.997,31.972 42.997,40.791 44.737,42.531 44.737,46.373 45.283,46.919 R12.2
NetR4_2: R4.2 U2.3 | length 16.5
  Top Layer w0.4: U2.3 34.884,7.715 32.773,9.827 32.773,14.273 33.8,15.3 37.017,15.3 37.909,14.409 R4.2
NetR4_3: R4.3 U2.2 | length 12
  Top Layer w0.2: R4.3@37.005,13.297 R4.3
  Top Layer w0.4: U2.2 34.746,8.985 33.573,10.158 33.573,13.573 34.5,14.5 36.5,14.5 37.005,13.995 R4.3@37.005,13.297
NetR4_4: R4.4 U2.1 | length 6.4
  Top Layer w0.4: R4.4@35.5,13.5 34.734,13.5 34.5,13.266 34.5,10.489 34.734,10.255 U2.1
NetR6_1: R6.1 U4.3 | length 31.9
  Top Layer w0.4: R6.1 41.168,11.83 v1(41.219,11.779) ; v1(59.888,22.447) U4.3
  Bottom Layer w0.4: v1(41.219,11.779) 42.176,11.779 42.518,12.121 44.193,12.121 44.242,12.072 55.101,12.072 58.072,15.043 58.072,20.631 v1(59.888,22.447)
NetR6_2: R6.2 U4.1 | length 30.1
  Top Layer w0.4: R6.2 42.284,11.857 v1(42.87,11.271) ; v1(59.634,19.907) U4.1
  Bottom Layer w0.4: v1(42.87,11.271) 46.045,11.271 46.316,11 55.553,11 57.348,12.795 57.729,12.795 58.872,13.938 58.872,19.145 v1(59.634,19.907)
RTS: Q1.2 R12.1 U3.14 | length 30.9
  Top Layer w0.4: Q1.2 36.932,45.932 43.5,52.5 45.01,52.5 45.183,52.673 51.037,52.673 51.602,53.239 53.999,53.239 54.325,53.565 U3.14
RXD: R22.1 U3.3 | length 37.5
  Top Layer w0.4: R22.1 26.35,35.147 27.203,36 v1(28,36) ; v1(50.109,46.45) 51.76,44.799 53.665,44.799 54.325,45.459 U3.3
  Bottom Layer w0.4: v1(28,36) 29.372,36 31.948,38.576 38.298,38.576 46.172,46.45 v1(50.109,46.45)
TXD: R21.1 U3.2 | length 35.4
  Top Layer w0.4: R21.1 v1(27.967,32.033) ; v1(52.776,46.196) 52.776,46.223 53.055,46.502 U3.2
  Bottom Layer w0.4: v1(27.967,32.033) 28.072,32.033 33.218,37.179 39.568,37.179 47.061,44.672 51.252,44.672 v1(52.776,46.196)
U0RXD: R21.2 U1.30 | length 4.8
  Top Layer w0.4: U1.30 21.458,31.159 22.332,32.033 R21.2
U0TXD: R22.2 U1.31 | length 6.8
  Top Layer w0.4: U1.31 20.394,31.959 21.915,33.48 21.915,35.147 22.23,35.462 R22.2
V_SIM_7V: P_IN.5 SIM.1 | length 106.6
  Top Layer w1.3: SIM.1 4.2,37.498 4.2,8.532 8.446,4.286 56.063,4.286 57.079,5.302 59.126,5.302 61.666,7.842 P_IN.5
VBUS: AMS2.3 C12.1 C15.1 D1.2 U3.16 | length 51.7
  Top Layer w0.4: AMS2.3 61.272,33.75 63.571,36.049 D1.2 D1.2@63.571,36.849 ; C12.1 C12.1@58.618,38.128 ; C15.1@58.618,40.3 C15.1
  Top Layer w0.5: U3.16 51.785,57.27 52.395,57.88 62.047,57.88 63.825,56.102 63.825,45.434 60.523,42.132 60.523,40.593 60.23,40.3 58.804,40.3 C15.1 ; C12.1 62.295,38.125 D1.2@63.571,36.849 ; C12.1@58.618,38.128 C15.1@58.618,40.3
VCC_3V3MCU: AMS2.2 AMS2.4 BH1750.5 C1.1 C2.1 C3.1 C4.1 C5.1 C16.1 C17.1 DS18.2 P_IN.2 R3.1 R4.5 R4.6 R4.7 R4.8 R5.2 R6.5 R6.6 R6.7 R6.8 R7.2 R8.2 R20.2 RA.3 RF.8 U1.3 U2.8 U4.2 | length 334.7
  Top Layer w0.2: C16.1@48.204,11.592 C16.1@48.239,11.557
  Top Layer w0.4: RA.3 22.218,44.718 23.603,46.103 27.523,46.103 27.757,46.337 v1(27.757,52.546) ; R3.1@26.925,61.978 R3.1 R3.1@26.989,61.814 ; R6.8 R6.5 R6.5@44.347,15.894 ; v1(47.5,17.5) 48.02,16.98 C17.1
  Top Layer w0.5: R3.1@26.925,61.978 27.63,62.683 DS18.2 ; R3.1@26.989,61.814 C3.1 ; C4.1 47.95,31.845 48.966,30.829 v1(48.966,27.262) ; v1(53.03,42.386) 53.044,42.372 AMS2.4
  Top Layer w0.6: RF.8@8,8.786 RF.8@8.036,8.822 ; C2.1 11.324,20.563 C1.1 11.485,20.501 12.285,21.301 12.801,21.301 13.5,22 13.5,22.5 13.828,22.828 R20.2 14.803,19.197 17,17 17,16 ; v1(12.009,34.639) 10.866,34.639 9.786,33.559 U1.3 6.909,33.559 5.35,32 5.35,11.58 RF.8 RF.8@8.036,8.822 ; R5.2 30.937,17.437 ; R6.8 41.062,16 38.5,16 37.063,17.437 30.937,17.437 ; U4.2@62.4,21.2 63.553,21.2 65.476,19.277 65.476,15.462 ; RF.8@8.036,8.822 9.358,7.5 15,7.5 17,9.5 17,16 ; 17,16 29.5,16 30.937,17.437
  Top Layer w0.7: C4.1 46.429,31.848 C5.1 46.529,34.836 49.902,31.464 52.649,31.464 53.044,31.859 AMS2.2 AMS2.4
  Top Layer w0.8: R4.5 R4.6 R4.7 R4.8 R4.8@39,11.663 ; R4.8@39,11.5 40.245,10.255 U2.8 v3@44.394,10.255 ; C17.1 48.204,15.529 C16.1@48.204,11.592 ; v3(48.239,9.659) C16.1@48.239,11.557 ; R7.2 58.044,15.146 R8.2 58.359,15.462 65.476,15.462 P_IN.2
  Bottom Layer w0.4: v1(12.009,34.639) 12.009,39.509 14.803,42.303 14.803,51.657 18.105,54.959 25.344,54.959 v1(27.757,52.546) ; DS18.2 27.757,66.357 v1(27.757,52.546) ; v1(53.03,42.386) 55.57,44.926 55.57,51.403 61.471,57.304 ; BH1750.5 61.471,57.304 ; v1(27.757,52.546) 31.694,52.546 38.679,59.531 59.243,59.531 61.471,57.304
  Bottom Layer w0.5: v1(47.5,17.5) 47.5,17.934 48.966,19.4 v1(48.966,27.262)
  Bottom Layer w0.8: v3@44.44,10.128 46.057,10.128 46.526,9.659 v3(48.239,9.659) ; v3@48.285,9.659 56.879,9.659 60.396,13.176 v3(60.396,15.335)
  other v3: 44.394,10.128
VCC_5VPW: P_IN.3 SHT.4 Soil.2 U485.4 | length 175.7
  Bottom Layer w1.2: Soil.2 12.644,66.51 14.654,64.5 17.301,64.5 22.365,69.564 31.436,69.564 36.897,64.103 48.966,64.103 48.966,65.966 51.88,68.88 60.963,68.88 61.644,68.199 61.644,66.506 SHT.4 65.241,66.484 67.821,69.064 71.462,69.064 71.848,68.678 71.848,68.466 73.711,66.603 73.711,52.78 71.699,50.768 71.699,29.559 65.984,23.844 65.984,14.319 67.242,13.061 ; U485.4@39.3,20.172 39.3,8.745 41.6,6.445 57.475,6.445 64.079,13.049 66.241,13.049 66.344,12.946 69.008,12.946 P_IN.3
pads on no net: R4.1 RA.6 RA.7 RA.8 RA.10 RA.11 RS485.1 RS485.2 RS485.4 SIM.5 SIM.6 SIM.7 U1.4 U1.7 U1.9 U1.10 U1.15 U1.17 U1.24 U1.25 U1.28 U1.29 U1.32 U1.33 U1.34 U1.35 U3.7 U3.8 U3.9 U3.10 U3.11 U3.12 U3.15 U4.4
copper on no net:
  other v2: 76.1,3.1 3.4,3.2 3.3,71.7 76.8,71.9
  other v4: 18.143,13.684 25.748,13.689

## Polygon pours and split planes (outlines as drawn)
GND on Bottom Layer "GND_L02_P000" (solid, pour order 0): 0,75 0,0 80,0 80,75
GND on Top Layer "GND_L01_P001" (solid, pour order 1): 0,75 0,0 80,0 80,75

## Keep-outs
Keep-Out Layer:
  lines w0.254: 0,0 80,0 80,75 0,75 0,0

## Silkscreen, mask and mechanical layers (free items; w line width, h text height)
Top Overlay:
  text "PLANT_CARE V1.0" at 4.192,45.954 h1.52 r90

## Text inside footprints (layer, text, board x,y; h text height)
U3: Top Overlay "16" at 51.15,55.315 h0.89 r90; Top Overlay "9" at 62.114,56.043 h0.89 r90; Top Overlay "8" at 62.237,48.149 h0.89 r90; Top Overlay "1" at 51.277,48.076 h0.89 r90